# EAGLE board lul (EAGLE 9.6.1)
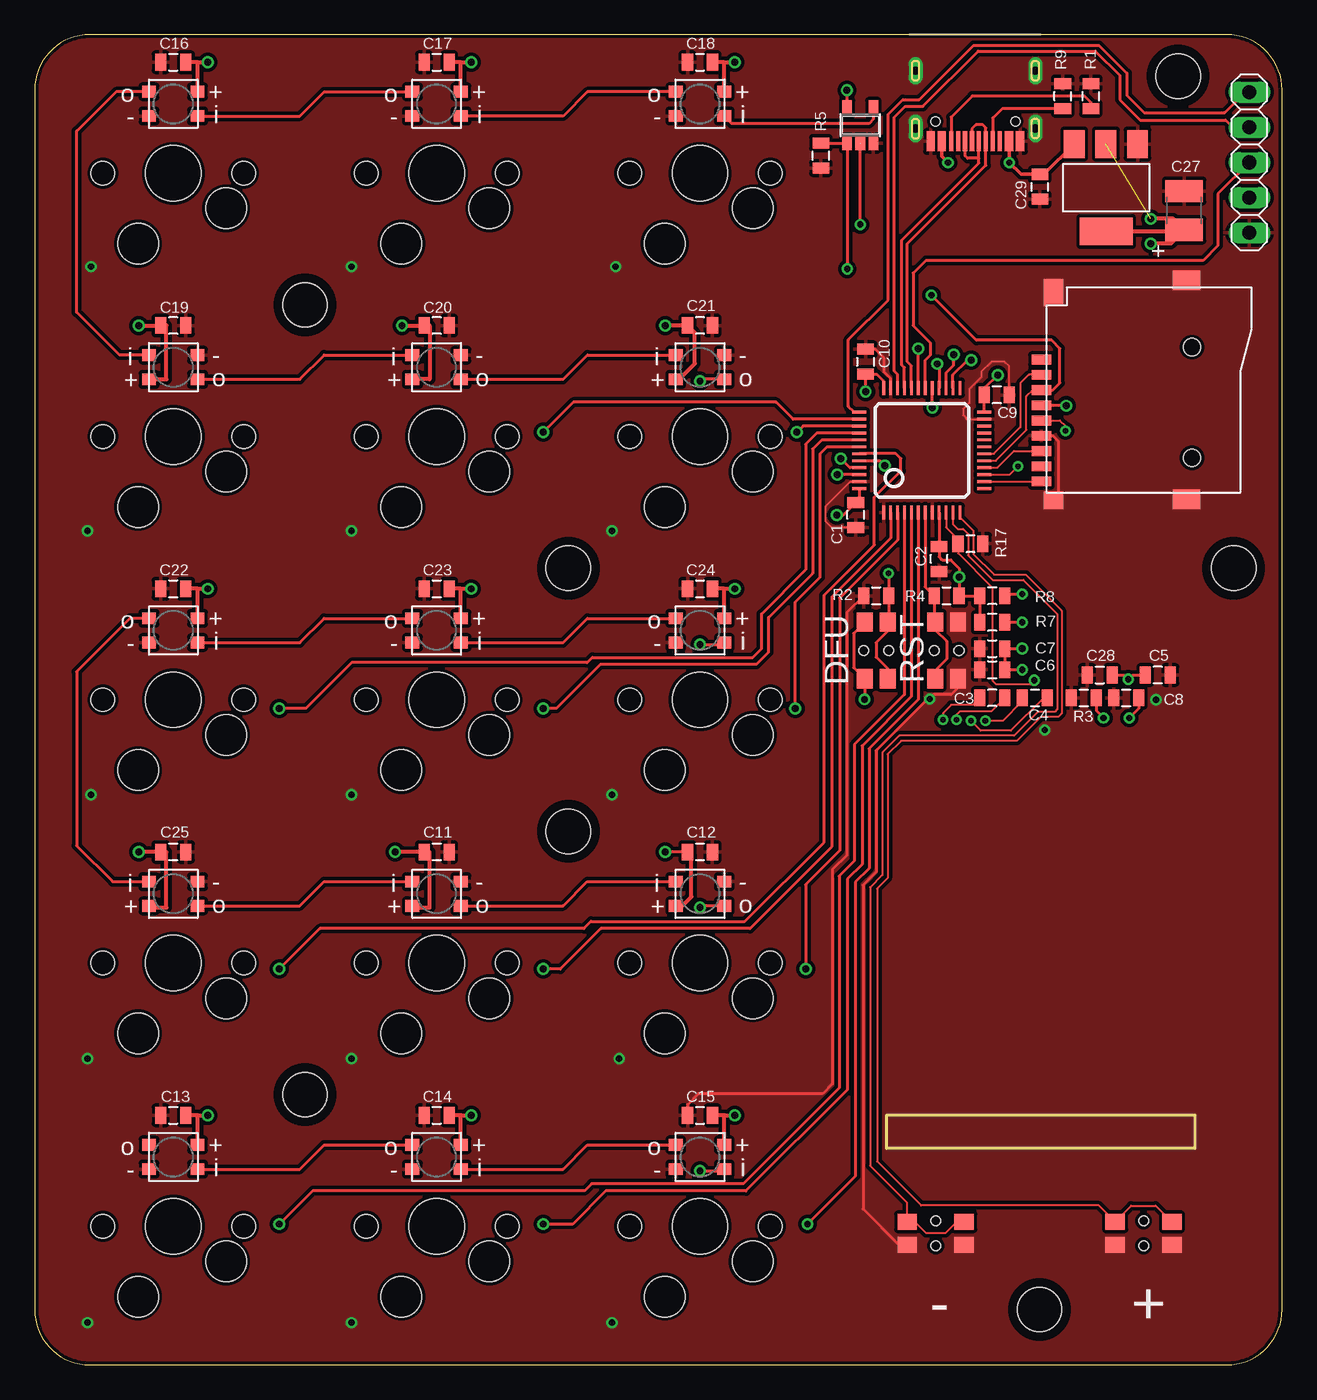
[diagram p0: board, top side]
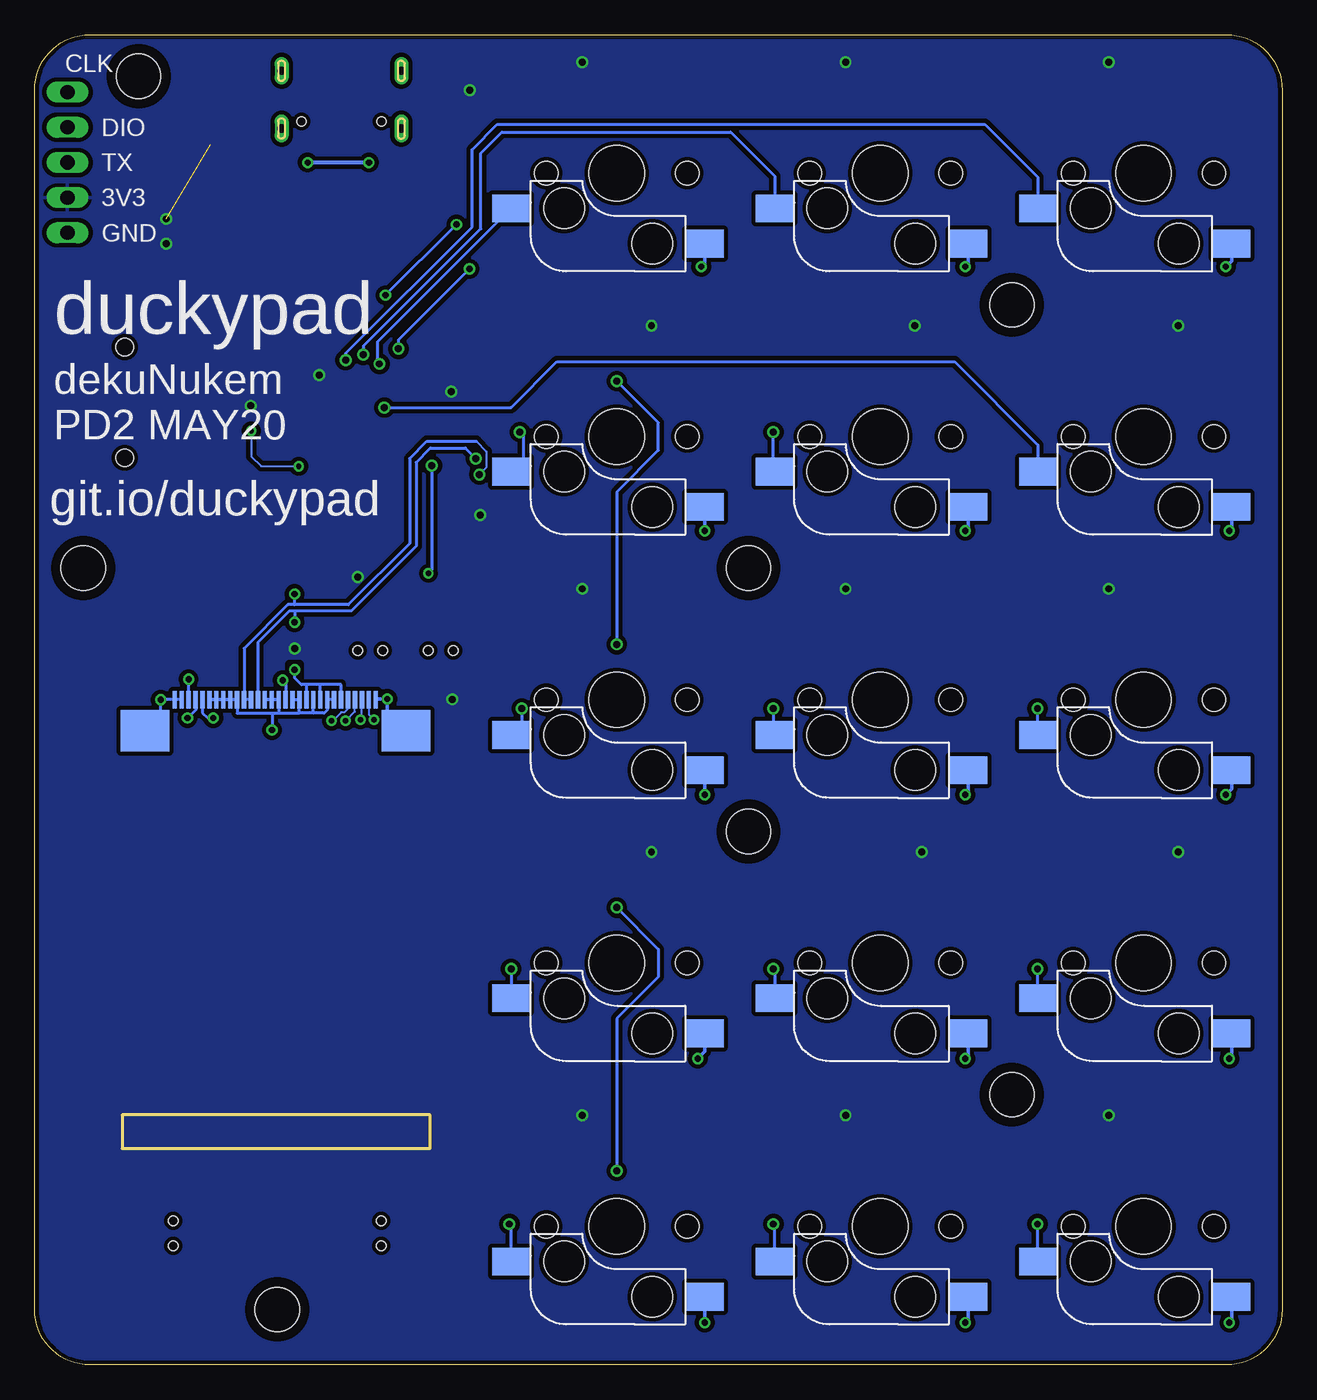
[diagram p1: board, bottom side, seen from below]

Size 90 x 96 mm. Coordinates in mm from the lower left corner, seen from the top.
Outline: 0,92 0,4 arc90 4,0 86,0 arc90 90,4 90,92 arc90 86,96 4,96 arc90 0,92
Copper layers (1*16): Top 0.035mm / dielectric 1.5mm / Bottom 0.035mm
Design rules "deku_2layer_6mil": minimum track width 6mil, minimum drill 15mil, track to track 6mil, track to pad 6mil, pad to pad 6mil, via to via 6mil, smd to smd 6mil, copper to edge 10mil, drill to drill 6mil, minimum pad ring 7mil, minimum via ring 7mil, stop-mask expansion 4mil, vias tented up to drill 25mil, thermal gap 10mil
bRestrict: area 67.8,48.1 to 70.9,49.2; area 70.9,48.8 to 71.6,50.6
Milling: area 61.5,15.6 to 83.7,18

## Footprints (pad centres in the part's own frame; a part is rotated, then mirrored left to right if it is on the bottom)
0805@1 = smd 0.8 x 1.2: 1 -0.9,0; 2 0.9,0
C1210 = smd 1.6 x 2.7: 1 -1.4,0; 2 1.4,0
TQFP48 = smd 0.2 x 1: 1 -2.75,-4.5; 2 -2.25,-4.5; 3 -1.75,-4.5; 4 -1.25,-4.5; 5 -0.75,-4.5; 6 -0.25,-4.5; 7 0.25,-4.5; 8 0.75,-4.5; 9 1.25,-4.5; 10 1.75,-4.5; 11 2.25,-4.5; 12 2.75,-4.5; 25 2.75,4.5; 26 2.25,4.5; 27 1.75,4.5; 28 1.25,4.5; 29 0.75,4.5; 30 0.25,4.5; 31 -0.25,4.5; 32 -0.75,4.5; 33 -1.25,4.5; 34 -1.75,4.5; 35 -2.25,4.5; 36 -2.75,4.5 | smd 1 x 0.2: 13 4.5,-2.75; 14 4.5,-2.25; 15 4.5,-1.75; 16 4.5,-1.25; 17 4.5,-0.75; 18 4.5,-0.25; 19 4.5,0.25; 20 4.5,0.75; 21 4.5,1.25; 22 4.5,1.75; 23 4.5,2.25; 24 4.5,2.75; 37 -4.5,2.75; 38 -4.5,2.25; 39 -4.5,1.75; 40 -4.5,1.25; 41 -4.5,0.75; 42 -4.5,0.25; 43 -4.5,-0.25; 44 -4.5,-0.75; 45 -4.5,-1.25; 46 -4.5,-1.75; 47 -4.5,-2.25; 48 -4.5,-2.75
SOT223 = smd 1.499 x 2.007: 1 -2.261,-3.15; 2 0.025,-3.15; 3 2.311,-3.15 | smd 3.81 x 2.007: 4 0,3.15
SOT23-5 = smd 0.69 x 0.99: 1 -0.95,-1.29; 2 0,-1.29; 3 0.95,-1.29; 4 0.95,1.3; 5 -0.95,1.3
1X05 = drill 1.016 long: 1 -5.08,0; 2 -2.54,0; 3 0,0; 4 2.54,0; 5 5.08,0
LED3535 = smd 1 x 0.85: 1 -1.75,0.875; 2 -1.75,-0.875; 3 1.75,-0.875; 4 1.75,0.875
0805 = smd 0.8 x 1.2: 1 -0.9,0; 2 0.9,0
TF-PULL = smd 0.7 x 1.4: 1 -2.2,-7.62; 2 -1.1,-7.62; 3 0,-7.62; 4 1.1,-7.62; 5 2.2,-7.62; 6 3.3,-7.62; 7 4.4,-7.62; 8 5.5,-7.62; 9 6.6,-7.62 | smd 1.4 x 2: S1 -7.9,2.85; S2 7.9,2.85 | smd 1.28 x 1.4: S3 7.96,-6.75 | smd 1.95 x 1.4: S4 -7.025,-6.75 | hole 1.25: -3.1,3.25; 4.9,3.25
342_SWICH_FOOT_HOLE = smd 1.4 x 1.15: P$1 -2.05,-0.825; P$2 -2.05,0.825; P$3 2.05,0.825; P$4 2.05,-0.825 | hole 0.7: 0,0.9; 0,-0.9
SWITCH_SOCKET = smd 2.7 x 2 bottom: 1 6.355,5.08; 2 -7.625,2.54 | hole 4: 0,0 | hole 2.93: -3.81,2.54; 2.54,5.08 | hole 1.7: -5.08,0; 5.08,0
LUL_UG-2864HSWEG01_1.3_WRAPAROUND = smd 0.31 x 1.28 bottom: 1 -7.25,0; 2 -6.75,0; 3 -6.25,0; 4 -5.75,0; 5 -5.25,0; 6 -4.75,0; 7 -4.25,0; 8 -3.75,0; 9 -3.25,0; 10 -2.75,0; 11 -2.25,0; 12 -1.75,0; 13 -1.25,0; 14 -0.75,0; 15 -0.25,0; 16 0.25,0; 17 0.75,0; 18 1.25,0; 19 1.75,0; 20 2.25,0; 21 2.75,0; 22 3.25,0; 23 3.75,0; 24 4.25,0; 25 4.75,0; 26 5.25,0; 27 5.75,0; 28 6.25,0; 29 6.75,0; 30 7.25,0 | smd 3.5 x 3 bottom: 31 -9.45,-2.24; 32 9.4,-2.24
USBC_16P_FOOT = smd 0.6 x 1.45: A1B12 -3.225,3.848; A4B9 -2.425,3.848; B4A9 2.425,3.848; B11A12 3.225,3.848 | smd 0.3 x 1.45: A5 -1.25,3.848; A6 -0.25,3.848; A7 0.25,3.848; A8 1.25,3.848; B5 1.75,3.848; B6 0.75,3.848; B7 -0.75,3.848; B8 -1.75,3.848 | drill 0.6 pad 1 long: P$13 -4.32,2.933; P$14 4.32,2.933; P$15 -4.32,-1.248; P$16 4.32,-1.248 | hole 0.65: -2.89,2.402; 2.89,2.402
M3_MOUNTING_HOLE_PACK = hole 3.2: 0,0

## Placement (x,y rotation side)
C1  100nF  [0805@1]  59.23,61.34 90 top
C2  100nF  [0805@1]  65.25,58.17 90 top
C3  1uF  [0805@1]  69.09,48.13 180 top
C4  1uF  [0805@1]  72.16,48.13 0 top
C5  2.2uF  [0805@1]  81.03,49.78 180 top
C6  1uF  [0805@1]  69.09,50.16 0 top
C7  2.2uF  [0805@1]  69.09,51.69 0 top
C8  2.2uF  [0805@1]  78.74,48.13 0 top
C9  100nF  [0805@1]  69.42,70 180 top
C10  100nF  [0805@1]  59.94,72.39 270 top
C11  100nF  [0805@1]  29,37.01 180 top
C12  100nF  [0805@1]  48,37.01 180 top
C13  100nF  [0805@1]  10,18.01 0 top
C14  100nF  [0805@1]  29,18.01 0 top
C15  100nF  [0805@1]  48,18.01 0 top
C16  100nF  [0805@1]  10,94.01 0 top
C17  100nF  [0805@1]  29,94.01 0 top
C18  100nF  [0805@1]  48,94.01 0 top
C19  100nF  [0805@1]  10,75.01 180 top
C20  100nF  [0805@1]  29,75.01 180 top
C21  100nF  [0805@1]  48,75.01 180 top
C22  100nF  [0805@1]  10,56.01 0 top
C23  100nF  [0805@1]  29,56.01 0 top
C24  100nF  [0805@1]  48,56.01 0 top
C25  100nF  [0805@1]  10,37.01 180 top
C27  47uF  [C1210]  82.93,83.31 90 top
C28  1uF  [0805@1]  76.83,49.78 0 top
C29  100nF  [0805@1]  72.52,85.01 90 top
IC1  STM32F072C8T6  [TQFP48]  64,66 0 top
IC2  REG1117  [SOT223]  77.31,84.95 180 top
IC3  74AHCT1G08DBV  [SOT23-5]  59.56,89.46 0 top
JP1  [1X05]  87.63,86.77 270 top
LED1  WS2812B3535  [LED3535]  10,91 180 top
LED2  WS2812B3535  [LED3535]  29,91 180 top
LED3  WS2812B3535  [LED3535]  48,91 180 top
LED4  WS2812B3535  [LED3535]  10,72 0 top
LED5  WS2812B3535  [LED3535]  29,72 0 top
LED6  WS2812B3535  [LED3535]  48,72 0 top
LED7  WS2812B3535  [LED3535]  10,53 180 top
LED8  WS2812B3535  [LED3535]  29,53 180 top
LED9  WS2812B3535  [LED3535]  48,53 180 top
LED10  WS2812B3535  [LED3535]  10,34 0 top
LED11  WS2812B3535  [LED3535]  29,34 0 top
LED12  WS2812B3535  [LED3535]  48,34 0 top
LED13  WS2812B3535  [LED3535]  10,15 180 top
LED14  WS2812B3535  [LED3535]  29,15 180 top
LED15  WS2812B3535  [LED3535]  48,15 180 top
R1  5.1K  [0805]  76.2,91.57 90 top
R2  10K  [0805]  60.71,55.5 0 top
R3  560K  [0805]  75.69,48.13 0 top
R4  10K  [0805]  65.79,55.5 0 top
R5  10K  [0805]  56.72,87.27 90 top
R7  5.1K  [0805]  69.09,53.59 180 top
R8  5.1K  [0805]  69.09,55.5 180 top
R9  5.1K  [0805]  74.17,91.57 90 top
R17  10K  [0805]  67.51,59.26 180 top
SD1  TF-HOLDER  [TF-PULL]  80.25,70.35 270 top
SW1  324_SW324_SWITCH_FOOT_HOLE  [342_SWICH_FOOT_HOLE]  60.71,51.56 270 top
SW2  324_SW324_SWITCH_FOOT_HOLE  [342_SWICH_FOOT_HOLE]  65.79,51.56 270 top
SW3  324_SW324_SWITCH_FOOT_HOLE  [342_SWICH_FOOT_HOLE]  65,9.5 0 top
SW4  324_SW324_SWITCH_FOOT_HOLE  [342_SWICH_FOOT_HOLE]  80,9.5 0 top
SW5  KAILH_SWITCH_SOCKET  [SWITCH_SOCKET]  10,86 180 top
SW6  KAILH_SWITCH_SOCKET  [SWITCH_SOCKET]  29,86 180 top
SW7  KAILH_SWITCH_SOCKET  [SWITCH_SOCKET]  48,86 180 top
SW8  KAILH_SWITCH_SOCKET  [SWITCH_SOCKET]  10,67 180 top
SW9  KAILH_SWITCH_SOCKET  [SWITCH_SOCKET]  29,67 180 top
SW10  KAILH_SWITCH_SOCKET  [SWITCH_SOCKET]  48,67 180 top
SW11  KAILH_SWITCH_SOCKET  [SWITCH_SOCKET]  10,48 180 top
SW12  KAILH_SWITCH_SOCKET  [SWITCH_SOCKET]  29,48 180 top
SW13  KAILH_SWITCH_SOCKET  [SWITCH_SOCKET]  48,48 180 top
SW14  KAILH_SWITCH_SOCKET  [SWITCH_SOCKET]  10,29 180 top
SW15  KAILH_SWITCH_SOCKET  [SWITCH_SOCKET]  29,29 180 top
SW16  KAILH_SWITCH_SOCKET  [SWITCH_SOCKET]  48,29 180 top
SW17  KAILH_SWITCH_SOCKET  [SWITCH_SOCKET]  10,10 180 top
SW18  KAILH_SWITCH_SOCKET  [SWITCH_SOCKET]  29,10 180 top
SW19  KAILH_SWITCH_SOCKET  [SWITCH_SOCKET]  48,10 180 top
U1  UG-2864HSWEG01  [LUL_UG-2864HSWEG01_1.3_WRAPAROUND]  72.64,48.01 0 top
U2  USBC_16P  [USBC_16P_FOOT]  67.87,92.15 180 top
U$7  M3_MOUNTING_HOLE  [M3_MOUNTING_HOLE_PACK]  19.5,19.5 0 top
U$9  M3_MOUNTING_HOLE  [M3_MOUNTING_HOLE_PACK]  86.5,57.5 0 top
U$10  M3_MOUNTING_HOLE  [M3_MOUNTING_HOLE_PACK]  82.5,93 0 top
U$11  M3_MOUNTING_HOLE  [M3_MOUNTING_HOLE_PACK]  19.5,76.5 0 top
U$14  M3_MOUNTING_HOLE  [M3_MOUNTING_HOLE_PACK]  72.5,4 0 top
U$15  M3_MOUNTING_HOLE  [M3_MOUNTING_HOLE_PACK]  38.5,57.5 0 top
U$16  M3_MOUNTING_HOLE  [M3_MOUNTING_HOLE_PACK]  38.5,38.5 0 top

## Library data of the parts
C1-C25 C27-C29 IC1 R2-R5 R7 R8 R17 SD1 U$7 U$9-U$11 U$14-U$16 = clock
IC2 = clock; MPN: REG1117; OC_FARNELL: 1097566; OC_NEWARK: 14P6981
IC3 = 74xx-little-de
JP1 = pinhead
LED1-LED15 U1 = lul
R1 R9 = joyAnalog
SW1-SW4 = 3pos_slide_switch
SW5-SW19 = Kailh_switch_socket
U2 = my_usbc_16p

## Nets
+3V3: C1.2 C2.2 C6.2 C7.2 C9.2 C10.2 C11.2 C12.2 C13.2 C14.2 C15.2 C16.2 C17.2 C18.2 C19.2 C20.2 C21.2 C22.2 C23.2 C24.2 C25.2 C27.1 IC1.9 IC1.24 IC1.36 IC1.48 IC2.2 IC2.4 IC3.5 JP1.4 LED1.2 LED2.2 LED3.2 LED4.2 LED5.2 LED6.2 LED7.2 LED8.2 LED9.2 LED10.2 LED11.2 LED12.2 LED13.2 LED14.2 LED15.2 R4.2 R7.2 R8.2 SD1.4 SW1.P$1 SW1.P$4 U1.6 U1.9 U1.11
BUTTON1: IC1.11 SW3.P$2 SW3.P$3
BUTTON2: IC1.12 SW4.P$2 SW4.P$3
DNDNDN: IC1.32 U2.A7 U2.B7
GND: C1.1 C2.1 C5.1 C6.1 C7.1 C8.1 C9.1 C10.1 C11.1 C12.1 C13.1 C14.1 C15.1 C16.1 C17.1 C18.1 C19.1 C20.1 C21.1 C22.1 C23.1 C24.1 C25.1 C27.2 C28.1 C29.1 IC1.1 IC1.8 IC1.23 IC1.35 IC1.47 IC2.1 IC3.3 JP1.5 LED1.4 LED2.4 LED3.4 LED4.4 LED5.4 LED6.4 LED7.4 LED8.4 LED9.4 LED10.4 LED11.4 LED12.4 LED13.4 LED14.4 LED15.4 R1.2 R2.1 R3.1 R5.1 R9.2 R17.1 SD1.6 SD1.S1 SD1.S2 SD1.S3 SD1.S4 SW2.P$2 SW2.P$3 SW3.P$1 SW3.P$4 SW4.P$1 SW4.P$4 SW5.1 SW6.1 SW7.1 SW8.1 SW9.1 SW10.1 SW11.1 SW12.1 SW13.1 SW14.1 SW15.1 SW16.1 SW17.1 SW18.1 SW19.1 U1.1 U1.7 U1.8 U1.10 U1.12 U1.13 U1.15 U1.16 U1.17 U1.21 U1.22 U1.23 U1.24 U1.25 U1.29 U1.30 U1.31 U1.32 U2.A1B12 U2.B11A12 U2.P$13 U2.P$14 U2.P$15 U2.P$16
LED_DATA_EN: IC1.31 IC3.1 R5.2
N$1: C29.2 IC2.3 U2.A4B9 U2.B4A9
N$2: IC1.44 R2.2 SW1.P$2 SW1.P$3
N$3: R3.2 U1.26
N$4: C3.2 U1.2
N$5: C3.1 U1.3
N$6: C4.2 U1.4
N$7: C4.1 U1.5
N$8: IC1.15 SD1.5
N$9: LED2.1 LED3.3
N$10: IC1.16 SD1.7
N$11: C5.2 C28.2 U1.28
N$12: C8.2 U1.27
N$14: IC1.14 SD1.9
N$15: LED1.1 LED2.3
N$17: LED1.3 LED4.1
N$18: LED4.3 LED5.1
N$19: LED5.3 LED6.1
N$20: LED6.3 LED9.1
N$21: LED8.1 LED9.3
N$22: LED7.1 LED8.3
N$23: LED7.3 LED10.1
N$24: LED10.3 LED11.1
N$25: LED11.3 LED12.1
N$26: LED12.3 LED15.1
N$27: LED14.1 LED15.3
N$28: LED13.1 LED14.3
N$29: IC3.4 LED3.1
N$31: R1.1 U2.B5
N$32: IC1.37 JP1.1
N$33: R9.1 U2.A5
N$34: IC1.34 JP1.2
OLED_RESET: IC1.10 R17.2 U1.14
RST: IC1.7 R4.1 SW2.P$1 SW2.P$4
SCL: IC1.45 R7.1 U1.18
SD_CS: IC1.18 SD1.2
SDA: IC1.46 R8.1 U1.19 U1.20
SPI_MOSI: IC1.17 IC3.2 SD1.3
SW1: IC1.26 SW5.2
SW2: IC1.27 SW6.2
SW3: IC1.28 SW7.2
SW4: IC1.29 SW8.2
SW5: IC1.38 SW9.2
SW6: IC1.39 SW10.2
SW7: IC1.40 SW11.2
SW8: IC1.41 SW12.2
SW9: IC1.42 SW13.2
SW10: IC1.43 SW14.2
SW11: IC1.2 SW15.2
SW12: IC1.3 SW16.2
SW13: IC1.4 SW17.2
SW14: IC1.5 SW18.2
SW15: IC1.6 SW19.2
UART1_TX: IC1.30 JP1.3
USB_DP: IC1.33 U2.A6 U2.B6

## Tracks (layer width: path | path; a pad name or v marks a point on that pad's centre or on a via)
+3V3  (via drill 0.45, 0.5)  (1 unrouted)
  Top 0.203: v59.94,70.23 C10.2 60.77,71.49 61.25,71.01 IC1.36 | SD1.4 74.38,69.25 v74.42,69.22 | C12.2 v45.5,37.01 | IC3.5 58.61,91.99 v58.6,92 | v69.47,71.42 68.52,70.47 C9.2 68.5,69.98 IC1.24 | v57.86,61.34 58.33,61.34 C1.2 59.5,62.51 IC1.48 | SW1.P$1 59.88,53.58 59.08,52.78 59.08,50.32 SW1.P$4 59.88,48.05 v59.87,48.03 | IC1.9 C2.2 65.25,58.32 65.48,58.09 66.09,58.09 66.7,57.48 v66.7,56.84 66.7,55.51 R4.2 R8.2 R7.2 | v71.25,51.69 C7.2 C6.2 v71.25,50.16
  Top 0.305: 11.75,18.01 C13.2 | 11.75,18.01 v12.5,18.01 | LED13.2 11.75,18.01 | 30.75,18.01 C14.2 | 30.75,18.01 v31.5,18.01 | LED14.2 30.75,18.01 | 49.75,18.01 C15.2 | 49.75,18.01 v50.5,18.01 | LED15.2 49.75,18.01 | v7.5,75.01 C19.2 9.5,75.01 9.5,71.12 LED4.2 | v26.5,75.01 C20.2 28.5,75.01 28.5,71.12 LED5.2 | v45.5,75.01 C21.2 47.62,74.48 47.62,72.26 46.49,71.12 LED6.2 | LED12.2 46.71,33.12 47.37,33.78 47.37,36.74 C12.2 | v7.5,37.01 C25.2 9.5,37.01 9.5,33 8.25,33 LED10.2 | v26,37.01 C11.2 28.5,37.01 28.5,33 27.25,33 LED11.2 | 11.75,94.01 C16.2 | 11.75,94.01 v12.5,94.01 | LED1.2 11.75,94.01 | 30.75,94.01 C17.2 | 30.75,94.01 v31.5,94.01 | LED2.2 30.75,94.01 | 49.75,94.01 C18.2 | 49.75,94.01 v50.5,94.01 | LED3.2 49.75,94.01 | 11.75,56.01 C22.2 | 11.75,56.01 v12.5,56.01 | LED7.2 11.75,56.01 | 30.75,56.01 C23.2 | 30.75,56.01 v31.5,56.01 | LED8.2 30.75,56.01 | 49.75,56.01 C24.2 | 49.75,56.01 v50.5,56.01 | LED9.2 49.75,56.01 | IC2.4 82.82,81.81 | 82.82,81.81 C27.1 82.14,82.7 v80.52,82.7 | v80.52,80.92 81.94,80.92 82.82,81.81
  Bottom 0.203: U1.6 67.89,49.1 69.39,49.1 | 70.39,49.1 U1.11 | 69.39,49.1 70.39,49.1 | U1.9 69.39,49.1 | 70.39,49.1 70.76,49.1 71.25,49.58 v71.25,50.16
  pour Bottom (isolate 0.305): 0,96.01 0,0 90.04,0 90.04,96.01
BUTTON1
  Top 0.152: IC1.11 66.25,60.67 66.6,60.33 66.98,60.33 67.33,59.97 67.33,58.42 69.11,56.64 71.32,56.64 73.79,54.18 73.79,47.32 73.58,47.12 72.36,47.12 70.66,45.41 62.38,45.41 61.16,44.2 61.16,35.36 60.27,34.47 60.27,14.38 62.95,11.7 SW3.P$2 63.49,10.32 64.29,9.53 65.72,9.53 66.52,10.32 SW3.P$3
BUTTON2
  Top 0.152: IC1.12 66.75,61.17 67.72,60.2 67.72,58.52 69.22,57.02 71.5,57.02 74.09,54.43 74.09,47.02 73.84,46.76 72.59,46.76 70.87,45.03 62.51,45.03 61.54,44.07 61.54,35.13 60.78,34.37 60.78,14.68 63.96,11.51 76.77,11.51 SW4.P$2 79.11,11.48 80.87,11.48 82.03,10.32 SW4.P$3
DNDNDN
  Top 0.203: IC1.32 63.25,72.11 62.94,72.42 62.94,80.9 68.62,86.58 U2.B7 68.62,89.27 68.4,89.48 67.89,89.48 67.62,89.21 U2.A7
GND  (via drill 0.45)
  Top 0.152: IC1.23 67.26,68.25 66.98,68.53 66.98,68.99 67.44,69.44 67.44,70.43 68.3,71.3 68.3,71.68 69.04,72.42 69.95,72.42 70.31,72.06 70.31,70.01 C9.1 | C1.1 57.49,60.44 57.07,60.86 57.07,61.98 58.85,63.75 IC1.47
  Top 0.203: IC1.35 61.75,71.19 61.29,71.65 61.29,72.64 60.64,73.29 C10.1 | SD1.6 73.46,67.05 73.86,66.65 73.86,62.76 SD1.S3 | R2.1 58.6,54.29 58.6,36.78 57.56,35.74 57.56,20.27 56.84,19.56 47.88,19.56 47.1,18.78 C15.1 | SW2.P$3 66.61,48.86 66.12,48.36 64.87,48.36 v64.57,48.06 64.44,48.06 60.71,44.32 60.71,35.56 59.77,34.62 59.77,11.25 62.34,8.68 SW3.P$1
  Bottom 0.203: U1.13 U1.12 70.89,47.04 | U1.7 U1.8 68.89,47.26 69.11,47.04 69.89,47.04 | 69.89,47.04 70.89,47.04 | U1.15 72.39,47.04 | 72.39,47.04 70.89,47.04 | U1.21 75.39,47.04 72.87,47.04 | 72.87,47.04 72.39,47.04 | 69.89,47.04 U1.10 | U1.29 U1.30 v80.9,48.01 80.9,46.91 U1.32 | 72.87,47.04 v72.87,45.82
  Bottom 0.254: U1.31 64.57,47.14 v64.57,48.06 65.34,48.06 U1.1 | U1.15 U1.16 U1.17 | U1.21 U1.22 U1.23 U1.24 U1.25 | v4.06,79.25 3.65,79.67 SW5.1 | v22.86,79.25 22.64,79.46 SW6.1 | v41.91,79.25 41.65,79.51 SW7.1 | v3.81,60.2 3.65,60.36 SW8.1 | v22.86,60.2 22.64,60.41 SW9.1 | v41.66,60.2 41.65,60.21 SW10.1 | v4.06,41.15 3.65,41.57 SW11.1 | v22.86,41.15 22.64,41.36 SW12.1 | v41.66,41.15 41.65,41.16 SW13.1 | v3.81,22.1 3.65,22.26 SW14.1 | v22.86,22.1 22.64,22.31 SW15.1 | v42.16,22.1 41.65,22.62 SW16.1 | v3.81,3.05 3.65,3.21 SW17.1 | v22.86,3.05 22.64,3.26 SW18.1 | v41.66,3.05 41.65,3.06 SW19.1
  pour Top (isolate 0.254): 0,96 0,0 90,0 90,96
LED_DATA_EN  (via drill 0.45, 0.5)
  Top 0.203: IC1.31 v63.75,73.33 | R5.2 IC3.1 v58.61,79.11 v58.62,79.1
  Bottom 0.203: v58.62,79.1 63.75,73.97 v63.75,73.33
N$1  (via drill 0.45)
  Top 0.254: U2.B4A9 65.44,87.21 v65.89,86.77 | U2.A4B9 70.29,86.81 v70.32,86.78 | v70.31,86.77 71.16,85.91 C29.2 72.8,85.91 IC2.3
  Top 0.305: v70.32,86.78 v70.31,86.77
  Bottom 0.305: v65.89,86.77 v70.31,86.77
N$2  (via drill 0.38, 0.5)
  Top 0.203: IC1.44 60.99,65.25 v61.34,64.9 | v61.59,57.12 61.61,57.11 R2.2 61.61,53.69 SW1.P$2 61.53,52.95 60.71,52.12 60.71,51.08 61.53,50.25 SW1.P$3
  Bottom 0.203: v61.34,64.9 61.34,57.38 v61.59,57.12
N$3  (via drill 0.45)
  Top 0.203: R3.2 76.59,47.21 v77.11,46.69
  Bottom 0.203: U1.26 77.89,47.06 77.52,46.69 v77.11,46.69
N$4  (via drill 0.4)
  Top 0.152: v65.53,46.56 65.53,47.04 66.12,47.62 67.68,47.62 C3.2
  Bottom 0.152: v65.53,46.56 65.89,46.92 U1.2
N$5  (via drill 0.4)
  Top 0.152: v66.5,46.56 66.5,46.91 66.75,47.17 69.02,47.17 C3.1
  Bottom 0.152: v66.5,46.56 66.39,46.66 U1.3
N$6  (via drill 0.4)
  Top 0.152: v67.56,46.48 67.56,46.46 68.25,45.77 70.42,45.77 72.78,48.13 C4.2
  Bottom 0.152: v67.56,46.48 66.89,47.15 U1.4
N$7  (via drill 0.4)
  Top 0.152: C4.1 71.26,47.89 69.85,46.48 v68.58,46.48
  Bottom 0.152: U1.5 67.39,47.36 67.67,47.09 67.89,47.09 68.5,46.48 v68.58,46.48
N$8  (via drill 0.38)
  Top 0.152: IC1.15 70.35,64.25 v70.94,64.85 | SD1.5 73.96,68.15 74.37,67.74 v74.37,67.41
  Bottom 0.152: v74.37,67.41 74.37,65.56 73.66,64.85 v70.94,64.85
N$9
  Top 0.203: LED3.3 39.88,91.88 38.12,90.12 LED2.1
N$10
  Top 0.152: IC1.16 69.45,64.75 70.65,65.95 SD1.7
N$11  (via drill 0.45)
  Top 0.203: C5.2 79.2,49.78 v78.89,49.48 78.59,49.78 C28.2
  Bottom 0.203: U1.28 v78.89,49.48
N$12  (via drill 0.45)
  Top 0.203: C8.2 79.64,47.36 v78.97,46.69
  Bottom 0.203: U1.27 78.39,47.26 v78.97,46.69
N$14
  Top 0.152: IC1.14 SD1.9
  Top 0.203: SD1.9
N$15
  Top 0.203: LED2.3 20.88,91.88 19.12,90.12 LED1.1
N$17
  Top 0.203: LED1.3 5.88,91.88 3.04,89.03 3.04,75.97 6.12,72.88 LED4.1
N$18
  Top 0.203: LED5.1 20.88,72.88 19.12,71.12 LED4.3
N$19
  Top 0.203: LED6.1 39.88,72.88 38.12,71.12 LED5.3
N$20  (via drill 0.5)
  Top 0.203: v48,52 49.62,52 LED9.1 | LED6.3 48.12,71.12 v48,71
  Bottom 0.203: v48,52 48,63 45,66 45,68 v48,71
N$21
  Top 0.203: LED9.3 39.88,53.88 38.12,52.12 LED8.1
N$22
  Top 0.203: LED8.3 20.88,53.88 19.12,52.12 LED7.1
N$23
  Top 0.203: LED7.3 6.88,53.88 3.04,50.03 3.04,37.47 5.62,34.88 LED10.1
N$24
  Top 0.203: LED11.1 20.88,34.88 19.12,33.12 LED10.3
N$25
  Top 0.203: LED12.1 39.88,34.88 38.12,33.12 LED11.3
N$26  (via drill 0.5)
  Top 0.203: LED12.3 48.12,33.12 v48,33 | v48,14 49.62,14 LED15.1
  Bottom 0.203: v48,33 45,30 45,28 48,25 v48,14
N$27
  Top 0.203: LED15.3 39.88,15.88 38.12,14.12 LED14.1
N$28
  Top 0.203: LED14.3 20.88,15.88 19.12,14.12 LED13.1
N$29
  Top 0.203: IC3.4 60.51,89.9 60.2,89.59 50.29,89.59 LED3.1
N$31
  Top 0.203: R1.1 76.2,91.11 75.74,91.57 67.64,91.57 66.12,90.05 U2.B5
N$32
  Top 0.203: IC1.37 59.11,68.75 58.7,69.16 58.7,73.98 61.57,76.85 61.57,90.25 62.64,91.31 63.83,91.31 67.74,95.22 76.78,95.22 78.79,93.22 78.79,91.62 80.03,90.37 85.85,90.37 87.33,91.85 JP1.1
N$33
  Top 0.203: R9.1 69.81,90.67 69.12,89.97 U2.A5
N$34
  Top 0.203: IC1.34 62.25,71.48 62.03,71.7 62.03,90.04 62.81,90.83 64.08,90.83 68.07,94.82 76.53,94.82 78.28,93.07 78.28,91.31 79.76,89.84 85.91,89.84 86.44,89.31 JP1.2
OLED_RESET  (via drill 0.45)
  Top 0.152: IC1.10 65.75,60.44 66.61,59.57 R17.2 66.61,58.58 69.09,56.11 69.09,49.38 69.34,49.12 71.83,49.12 v72.11,49.4
  Bottom 0.203: v72.11,49.4 71.89,49.19 U1.14
RST
  Top 0.203: IC1.7 64.25,56.13 R4.1 64.89,53.69 SW2.P$1 64.96,53.05 65.79,52.22 65.79,50.93 64.96,50.1 SW2.P$4
SCL  (via drill 0.45, 0.5)
  Top 0.203: R7.1 v71.25,53.59 | IC1.45 58.82,64.75 v58.17,65.41
  Bottom 0.203: 71.25,54.41 67.16,54.41 62.48,59.08 62.48,65.13 61.44,66.17 58.93,66.17 v58.17,65.41 | 71.25,54.41 71.63,54.41 73.89,52.14 U1.18 | 71.25,54.41 v71.25,53.59
SD_CS
  Top 0.152: IC1.18 69.2,65.75 71.12,67.67 71.12,70.84 71.73,71.45 SD1.2
SDA  (via drill 0.45, 0.5)
  Top 0.203: R8.1 70.11,55.63 v71.25,55.63 | IC1.46 57.92,64.25 v57.91,64.26
  Bottom 0.152: 57.4,65.91 57.4,64.77 v57.91,64.26
  Bottom 0.178: 58.14,66.65 57.4,65.91
  Bottom 0.203: 71.27,54.86 67.36,54.86 62.94,59.28 62.94,65.41 61.7,66.65 58.14,66.65 | 71.27,54.86 71.73,54.86 74.89,51.7 U1.20 U1.19 | 71.27,54.86 71.25,54.89 v71.25,55.63
SPI_MOSI  (via drill 0.45)
  Top 0.152: IC1.17 69.34,65.25 71.55,67.46 71.55,69.9 72,70.35 SD1.3
  Top 0.203: SD1.3 73.45,70.35 73.97,70.87 73.97,73.36 73.38,73.94 67.94,73.94 v64.69,77.19 | v59.56,82.3 IC3.2
  Bottom 0.203: v64.69,77.19 59.59,82.3 v59.56,82.3
SW1  (via drill 0.5)
  Top 0.203: IC1.26 66.25,71.46 67.31,72.52 v67.56,72.52
  Bottom 0.203: v67.56,72.52 67.56,73 58.45,82.12 58.45,87.71 56.62,89.53 21.46,89.53 17.62,85.7 SW5.2
SW2  (via drill 0.5)
  Top 0.203: IC1.27 65.75,71.59 66.29,72.14 v66.29,72.9
  Bottom 0.203: v66.29,72.9 66.29,73.51 57.81,81.99 57.81,87.45 56.29,88.98 39.8,88.98 36.62,85.8 SW6.2
SW3  (via drill 0.5)
  Top 0.203: v65.13,72.24 65.25,72.11 IC1.28
  Bottom 0.203: v65.13,72.24 65.28,72.39 65.28,73.81 65.27,73.81 SW7.2
SW4  (via drill 0.5)
  Top 0.203: v64.77,69.09 64.77,70.48 IC1.29
  Bottom 0.203: SW8.2 17.62,66.39 23.62,72.39 52.32,72.39 55.63,69.09 v64.77,69.09
SW5  (via drill 0.5)
  Top 0.203: IC1.38 54.71,68.25 53.49,69.47 38.86,69.47 v36.7,67.31
  Bottom 0.203: SW9.2 36.7,64.54 v36.7,67.31
SW6  (via drill 0.5)
  Top 0.203: IC1.39 55.43,67.75 v54.99,67.31
  Bottom 0.203: v54.99,67.31 54.74,67.06 54.74,65.35 SW10.2
SW7  (via drill 0.5)
  Top 0.203: IC1.40 56.43,67.25 55.63,66.45 55.63,57.38 52.45,54.2 52.45,51.69 51.82,51.05 40.23,51.05 39.85,50.67 22.86,50.67 19.56,47.37 v17.65,47.37
  Bottom 0.203: v17.65,47.37 17.65,45.49 SW11.2
SW8  (via drill 0.5)
  Top 0.203: IC1.41 56.79,66.75 56.13,66.09 56.13,57.12 52.96,53.95 52.96,51.44 52.07,50.55 40.82,50.55 37.64,47.37 v36.7,47.37
  Bottom 0.203: v36.7,47.37 36.7,45.54 SW12.2
SW9  (via drill 0.5)
  Top 0.203: IC1.42 57.16,66.25 56.64,65.73 56.64,56.82 54.84,55.02 54.84,47.4 v54.86,47.37
  Bottom 0.203: v54.86,47.37 54.86,46.22 SW13.2
SW10  (via drill 0.5)
  Top 0.203: IC1.43 62.14,65.75 62.48,65.41 62.48,64.52 60.58,62.61 60.58,59.18 56.95,55.55 56.95,37.72 51.23,32 40.13,32 39.62,31.5 20.57,31.5 v17.65,28.57
  Bottom 0.203: v17.65,28.57 17.65,26.49 SW14.2
SW11  (via drill 0.5)
  Top 0.203: IC1.2 61.75,59.67 57.53,55.45 57.53,37.41 51.61,31.5 40.84,31.5 37.92,28.57 v36.7,28.57
  Bottom 0.203: v36.7,28.57 36.62,28.5 SW15.2
SW12  (via drill 0.5)
  Top 0.203: IC1.3 62.25,59.53 58.06,55.35 58.06,37.11 55.63,34.67 v55.63,28.57
  Bottom 0.203: v55.63,28.57 SW16.2
SW13  (via drill 0.5)
  Top 0.203: IC1.4 62.75,48.37 59.13,44.76 59.13,36.37 58.04,35.28 58.04,19.99 51.13,13.08 40.18,13.08 39.67,12.57 20.07,12.57 v17.65,10.16
  Bottom 0.203: v17.65,10.16 17.65,7.49 SW17.2
SW14  (via drill 0.5)
  Top 0.203: IC1.5 63.25,48.24 59.69,44.68 59.69,36.12 58.62,35.05 58.62,19.86 51.31,12.55 41.2,12.55 38.81,10.16 v36.7,10.16
  Bottom 0.203: SW18.2 36.62,10.08 v36.7,10.16
SW15  (via drill 0.5)
  Top 0.203: IC1.6 63.75,48.03 60.2,44.48 60.2,35.84 59.21,34.85 59.21,13.61 v55.75,10.16
  Bottom 0.203: SW19.2 55.62,10.03 v55.75,10.16
UART1_TX
  Top 0.203: IC1.30 64.25,72.5 64.64,72.9 64.64,73.74 63.37,75.01 63.37,78.79 64.29,79.7 84.3,79.7 85.37,80.77 85.37,84.51 JP1.3
USB_DP
  Top 0.203: IC1.33 62.75,71.97 62.56,72.16 62.56,81.18 68.12,86.74 68.12,87.07 | 68.12,87.07 U2.A6 | U2.B6 67.12,87.26 67.31,87.07 68.12,87.07

## Text on the board
tNames: DFU | RST | - | +
bNames: CLK | DIO | TX | 3V3 | GND | duckypad | dekuNukem / PD2 MAY20 | git.io/duckypad